# Altium PCB led_adapter.PcbDoc
Units mil, origin at the board's own origin, x right, y up, seen from the top; angles counter-clockwise.
Board outline 700 x 600 mil, 2 copper layers (Top Layer, Bottom Layer); 15 components, 12 nets, 24 pads, 0 vias.
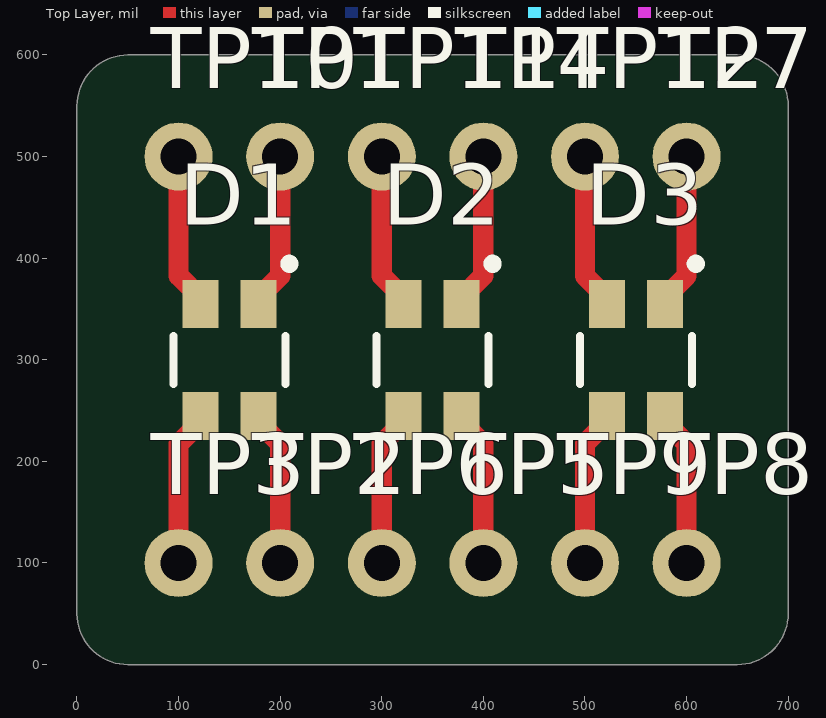
[diagram p0: Top Layer view]
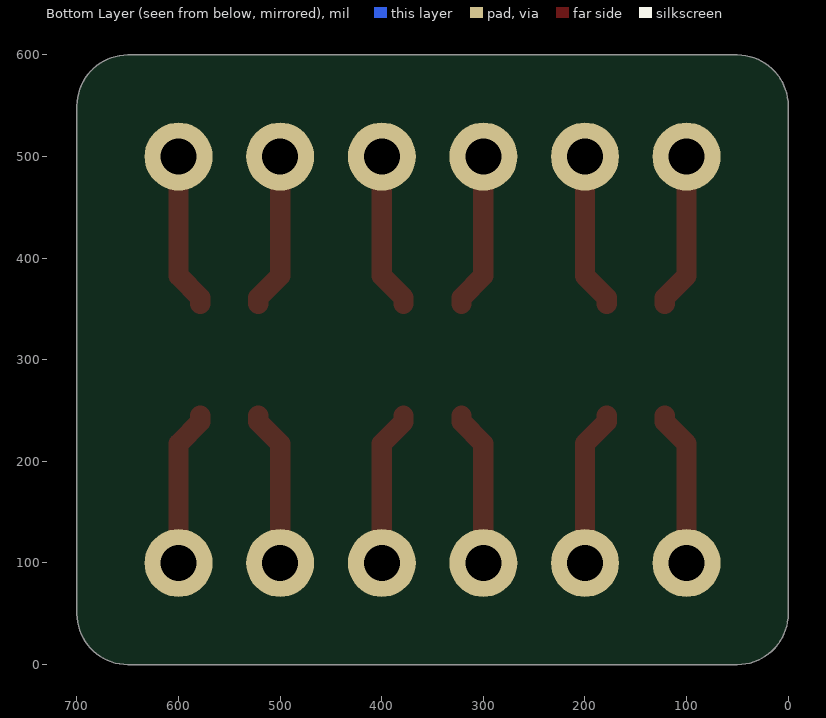
[diagram p1: Bottom Layer view, seen from below]
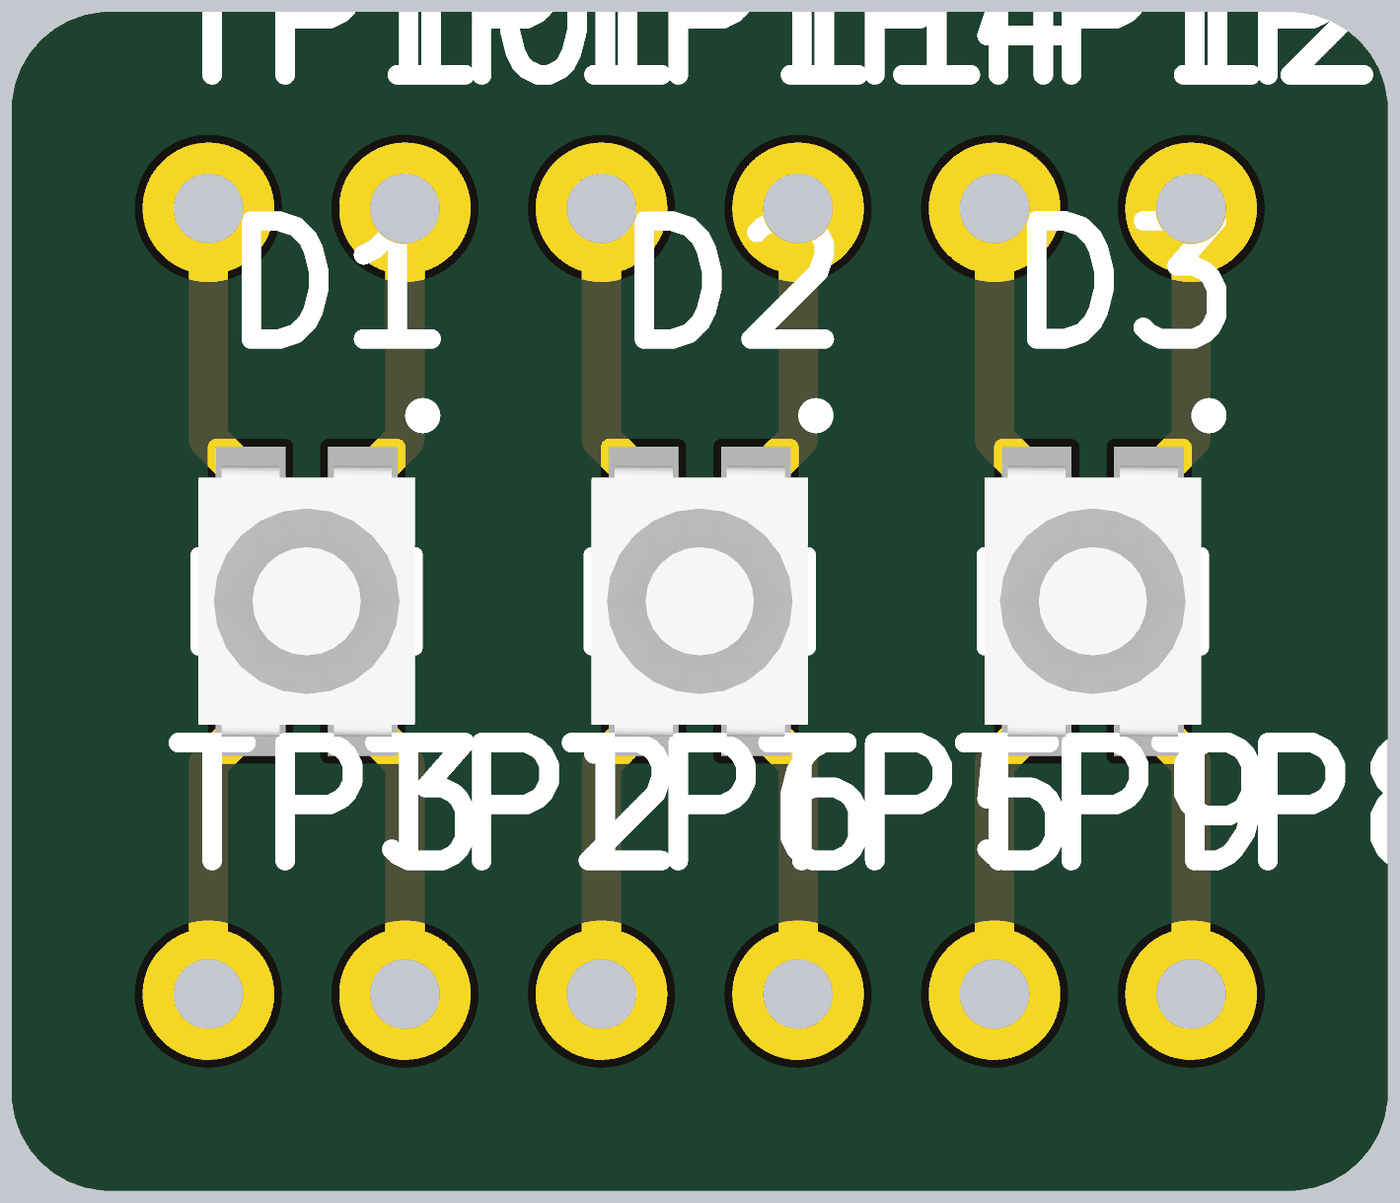
[diagram p2: 3D render of the assembled board from above, using the file's embedded part models]

## Layer stack, top to bottom
Top Solder: solder mask 0.4, Solder Resist, Dk 3.5
Top Layer: signal copper 1.4
Dielectric 1: dielectric 12.6, FR-4, Dk 4.8
Bottom Layer: signal copper 1.4
Bottom Solder: solder mask 0.4, Solder Resist, Dk 3.5

## Board outline
650,600 cw(c650,550) 700,550 700,50 cw(c650,50) 650,0 50,0 cw(c50,50) 0,50 0,550 cw(c50,550) 50,600

## Design rules (kind name [scope] priority, off if disabled: settings)
AcuteAngle [All] p1: minimum=6.00000000000000E+0001 checktracksonly=FALSE
Clearance "Othermill Pro Clearance" [All] p1: gap=16 ignorepadtopadclearanceinfootprint=FALSE
ComponentClearance "Othermill 1/64 Cmp Clearance" [All] p1: gap=16 collisioncheckmode=3 verticalgap=16 showdistances=FALSE
DiffPairsRouting "Othermill Pro DiffPairs" [All] p1: maxlimit=100 minlimit=6 mostfreqgap=10 toplayer_minwidth=6 toplayer_maxwidth=100 toplayer_prefwidth=10 bottomlayer_minwidth=6 bottomlayer_maxwidth=100 bottomlayer_prefwidth=10 maxuncoupledlength=500
HoleSize "Othermill 1/64 Hole" [All] p1: absolutevalues=TRUE maxlimit=100 minlimit=16 maxpercent=80.000 minpercent=20.000
HoleToHoleClearance "Othermill 1/64 Hole Clearance" [All] p1: gap=16 allowstackedmicrovias=TRUE
MinimumAnnularRing "Othermill Pro AR" [All] p1: minimumring=10
PlaneClearance "Othermill 1/64 Plane Clearance" [All] p1: clearance=18
PlaneConnect [All] p1: planeconnectstyle=Direct reliefexpansion=20 reliefentries=4 reliefconductorwidth=10 reliefairgap=10
PolygonConnect [All] p1: connectstyle=Direct reliefconductorwidth=10 reliefentries=4 polygonreliefangle="90 Angle" airgapwidth=10
RoutingCorners [All] p1: cornerstyle=45-Degree minsetback=50 maxsetback=50
RoutingVias "Othermill 1/64" [All] p1: holewidth=32 width=200 viastyle="Through Hole" minholewidth=16 minwidth=28 maxholewidth=100 maxwidth=56
SMDEntry [All] p1: side=TRUE corner=TRUE anyangle=FALSE
SilkToSilkClearance [All] p1: silktosilkclearance=0
SilkToSolderMaskClearance [IsPad] p1: minsilkscreentomaskgap=0 clearancetoexposedcopper=TRUE
SolderMaskExpansion [All] p1: expansion=4
ViasUnderSMD [All] p1: allowed=FALSE
Width "Othermill Pro Width" [All] p1: maxlimit=1000 minlimit=6 preferedwidth=10
21 further rules are at their usual default settings.

## Components (designator, comment, footprint, x,y, rotation, side; value= is the part's Value field where it differs from the comment)
D1 "XZM2CRKM2DGFBB45SCCB" SUN_PLCC4 150,300 r90 top
D2 "XZM2CRKM2DGFBB45SCCB" SUN_PLCC4 350,300 r90 top
D3 "XZM2CRKM2DGFBB45SCCB" SUN_PLCC4 550,300 r90 top
TP1 "PTH Test Point" TP_PTH 200,500 r0 top
TP2 "PTH Test Point" TP_PTH 200,100 r90 top
TP3 "PTH Test Point" TP_PTH 100,100 r90 top
TP4 "PTH Test Point" TP_PTH 400,500 r90 top
TP5 "PTH Test Point" TP_PTH 400,100 r90 top
TP6 "PTH Test Point" TP_PTH 300,100 r90 top
TP7 "PTH Test Point" TP_PTH 600,500 r90 top
TP8 "PTH Test Point" TP_PTH 600,100 r90 top
TP9 "PTH Test Point" TP_PTH 500,100 r90 top
TP10 "PTH Test Point" TP_PTH 100,500 r90 top
TP11 "PTH Test Point" TP_PTH 300,500 r90 top
TP12 "PTH Test Point" TP_PTH 500,500 r90 top

## Footprints (in the part's own frame and the unit in brackets; to place one, negate y for a bottom-side part, rotate by r counter-clockwise, add the part's x,y. Pads: shape width x height; smd on the part's side, far side on the other; paste and mask are expansions set on the pad)
SUN_PLCC4 [mm] "3.5x2.8mm PLCC4 SMD LED"
  rect 1.2x0.9 smd: 1(1.4,-0.725) 2(-1.4,-0.725) 3(-1.4,0.725) 4(1.4,0.725)
  silkscreen extent -0.6,-1.6 2.5,1.4, body extent -1.75,-1.4 1.75,1.4, height 1.87
TP_PTH [mm] "PTH Test Point"
  round 1.7 hole 0.9: 1(0,0)

## Part data
D1 D2 D3: library part "RGB LED", "LED RGB CLEAR 4PLCC SMD", Color="Red, Green, Blue (RGB)", Current - Test="20mA Red, 20mA Green, 20mA Blue", Lens Color=Colorless, Manufacturer=SunLED, Millicandela Rating="497mcd Red, 1590mcd Green, 327mcd Blue", Package / Case=4-PLCC, Supplier Part Number 1=1497-1225-1-ND, Voltage - Forward (Vf) (Typ)="2.2V Red, 3.2V Green, 3.3V Blue", Category=Optoelectronics, Family="LED Indication - Discrete", Features=-, Height (Max)=2.10mm, LatestRevisionDate=17-Jul-2002, LatestRevisionNote="Re-released for DXP Platform.", Lens Style/Size="Round with Flat Top, 2.40mm", Lens Transparency=Clear, Manufacturer Part Number=XZM2CRKM2DGFBB45SCCB, Mounting Type="Surface Mount", PackageDescription="SM LED; 2 Flat Leads", PackageReference=3.2X1.6X1.1, PackageVersion=Feb-2002, Packaging="Tape &amp; Reel (TR)", Pricing 1="1=1.17, 10=0.947, 25=0.7288, 100=0.6559, 250=0.583, 500=0.4956, 1000=0.4081 (USD)", Published=8-Jun-2000, Publisher="Altium Limited", Series=-, Size / Dimension="3.20mm L x 2.80mm W", Stock 1=1257, Supplier 1=Digikey, Supplier Device Package=4-PLCC, Viewing Angle=120°, Wavelength - Dominant="625nm Red, 525nm Green, 470nm Blue", Wavelength - Peak="640nm Red, 520nm Green, 465nm Blue"
TP1 TP2 TP3 TP4 TP5 TP6 TP7 TP8 TP9 TP10 TP11 TP12: "Test Point"

## Nets (pads, with @x,y where several pads share a name; then routed paths per layer and width w, separated by ;. In a path a pad name is that pad's centre, name@x,y a point inside that pad or via, vN(x,y) a via of type N, cw(c..) or ccw(c..) an arc to the next point about the centre after c; other vN are vias at no path point)
NetD1_1: D1.1 TP1.1 | length 153.8
  Top Layer w20: D1.1 178.54,361.02 200,382.48 TP1.1
NetD1_2: D1.2 TP2.1 | length 153.8
  Top Layer w20: D1.2 178.54,238.98 200,217.52 TP2.1
NetD1_3: D1.3 TP3.1 | length 153.8
  Top Layer w20: TP3.1 100,217.52 121.46,238.98 D1.3
NetD1_4: D1.4 TP10.1 | length 153.8
  Top Layer w20: TP10.1 100,382.48 121.46,361.02 D1.4
NetD2_1: D2.1 TP4.1 | length 153.8
  Top Layer w20: D2.1 378.54,361.02 400,382.48 TP4.1
NetD2_2: D2.2 TP5.1 | length 153.8
  Top Layer w20: D2.2 378.54,238.98 400,217.52 TP5.1
NetD2_3: D2.3 TP6.1 | length 153.8
  Top Layer w20: TP6.1 300,217.52 321.46,238.98 D2.3
NetD2_4: D2.4 TP11.1 | length 153.8
  Top Layer w20: TP11.1 300,382.48 321.46,361.02 D2.4
NetD3_1: D3.1 TP7.1 | length 153.8
  Top Layer w20: D3.1 578.54,361.02 600,382.48 TP7.1
NetD3_2: D3.2 TP8.1 | length 153.8
  Top Layer w20: D3.2 578.54,238.98 600,217.52 TP8.1
NetD3_3: D3.3 TP9.1 | length 153.8
  Top Layer w20: TP9.1 500,217.52 521.46,238.98 D3.3
NetD3_4: D3.4 TP12.1 | length 153.8
  Top Layer w20: TP12.1 500,382.48 521.46,361.02 D3.4

## Silkscreen, mask and mechanical layers (free items; w line width, h text height)
Mechanical 1:
  lines w5: 0,50 ccw(c50,50) 50,0 650,0 ccw(c650,50) 700,50 700,550 ccw(c650,550) 650,600 150,600 50,600 ccw(c50,550) 0,550 0,50